# EAGLE board ButtonPCB (EAGLE 8.6.3)
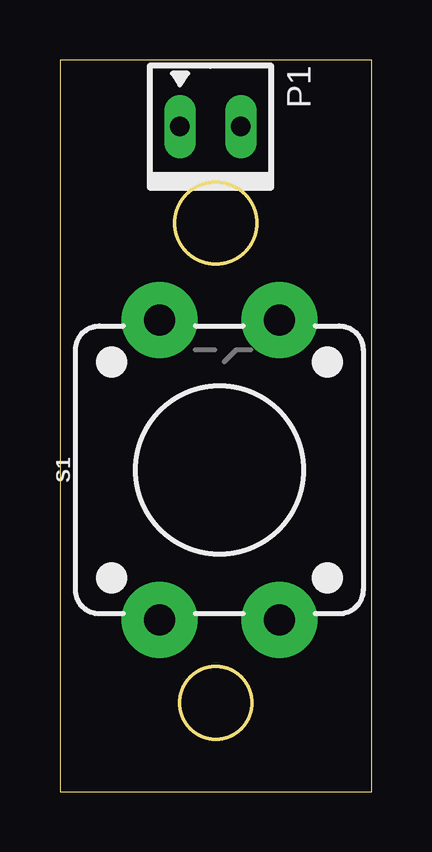
[diagram p0: board, top side]
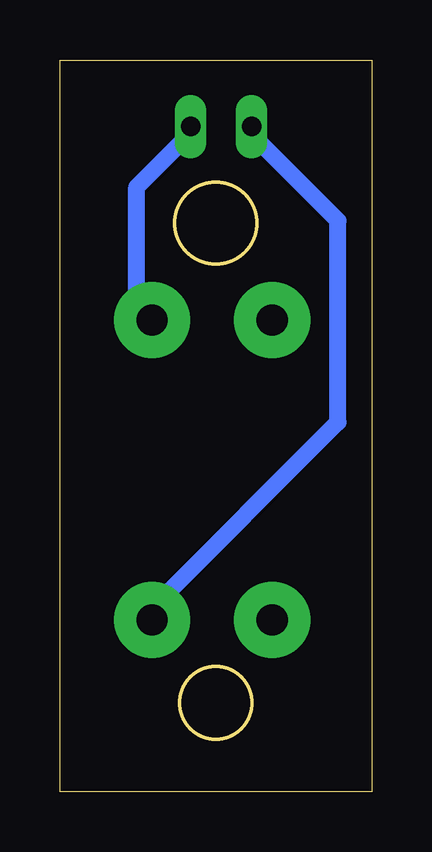
[diagram p1: board, bottom side, seen from below]

Size 13 x 30.5 mm. Coordinates in mm from the lower left corner, seen from the top.
Outline: 0,0 13,0 13,30.5 0,30.5 0,0
Outline: circle at 6.5,3.7 radius 1.5
Outline: circle at 6.5,23.7 radius 1.7
Copper layers (1*16): Top 0.035mm / dielectric 1.5mm / Bottom 0.035mm
Design rules "default *": minimum track width 0.7mm, minimum drill 0.7mm, track to track 0.7mm, track to pad 0.7mm, pad to pad 0.7mm, via to via 0.7mm, smd to smd 0.7mm, copper to edge 40mil, drill to drill 6mil, minimum pad ring 10mil, minimum via ring 8mil, stop-mask expansion 4mil, vias tented up to drill 0mil, thermal gap 10mil

## Footprints (pad centres in the part's own frame; a part is rotated, then mirrored left to right if it is on the bottom)
LCW-102-XX-X-S = drill 0.813 long: 1 1.27,0; 2 -1.27,0
TACTILE_SWITCH_PTH_12MM = drill 1.3 pad 3.175: 1 6.25,-2.5; 2 -6.25,-2.5; 3 6.25,2.5; 4 -6.25,2.5

## Placement (x,y rotation side)
P1  LCW-102-XX-X-S  [LCW-102-XX-X-S]  6.28,27.72 180 top
S1  [TACTILE_SWITCH_PTH_12MM]  6.65,13.41 90 top

## Library data of the parts
P1 = altered con-samtec
S1 = altered SparkFun-Switches

## Nets
N$1: P1.2 S1.1
N$2: P1.1 S1.2

## Tracks (layer width: path | path; a pad name or v marks a point on that pad's centre or on a via)
N$1
  Bottom 0.7: P1.2 7.7,27.3 9.8,25.2 9.8,20.3 S1.1
N$2
  Bottom 0.7: P1.1 4.9,27.3 1.4,23.8 1.4,15.4 9.1,7.7 S1.2